# Altium PCB 智能车主板.PcbDoc
Units mil, origin at the board's own origin, x right, y up, seen from the top; angles counter-clockwise.
Board outline 4330 x 2555 mil, 4 copper layers (Top, GND02, PWR03, Bottom), stack 23.756 mil thick; 92 components, 70 nets, 345 pads, 101 vias.
Unrouted connection lines stored in the file: 2.
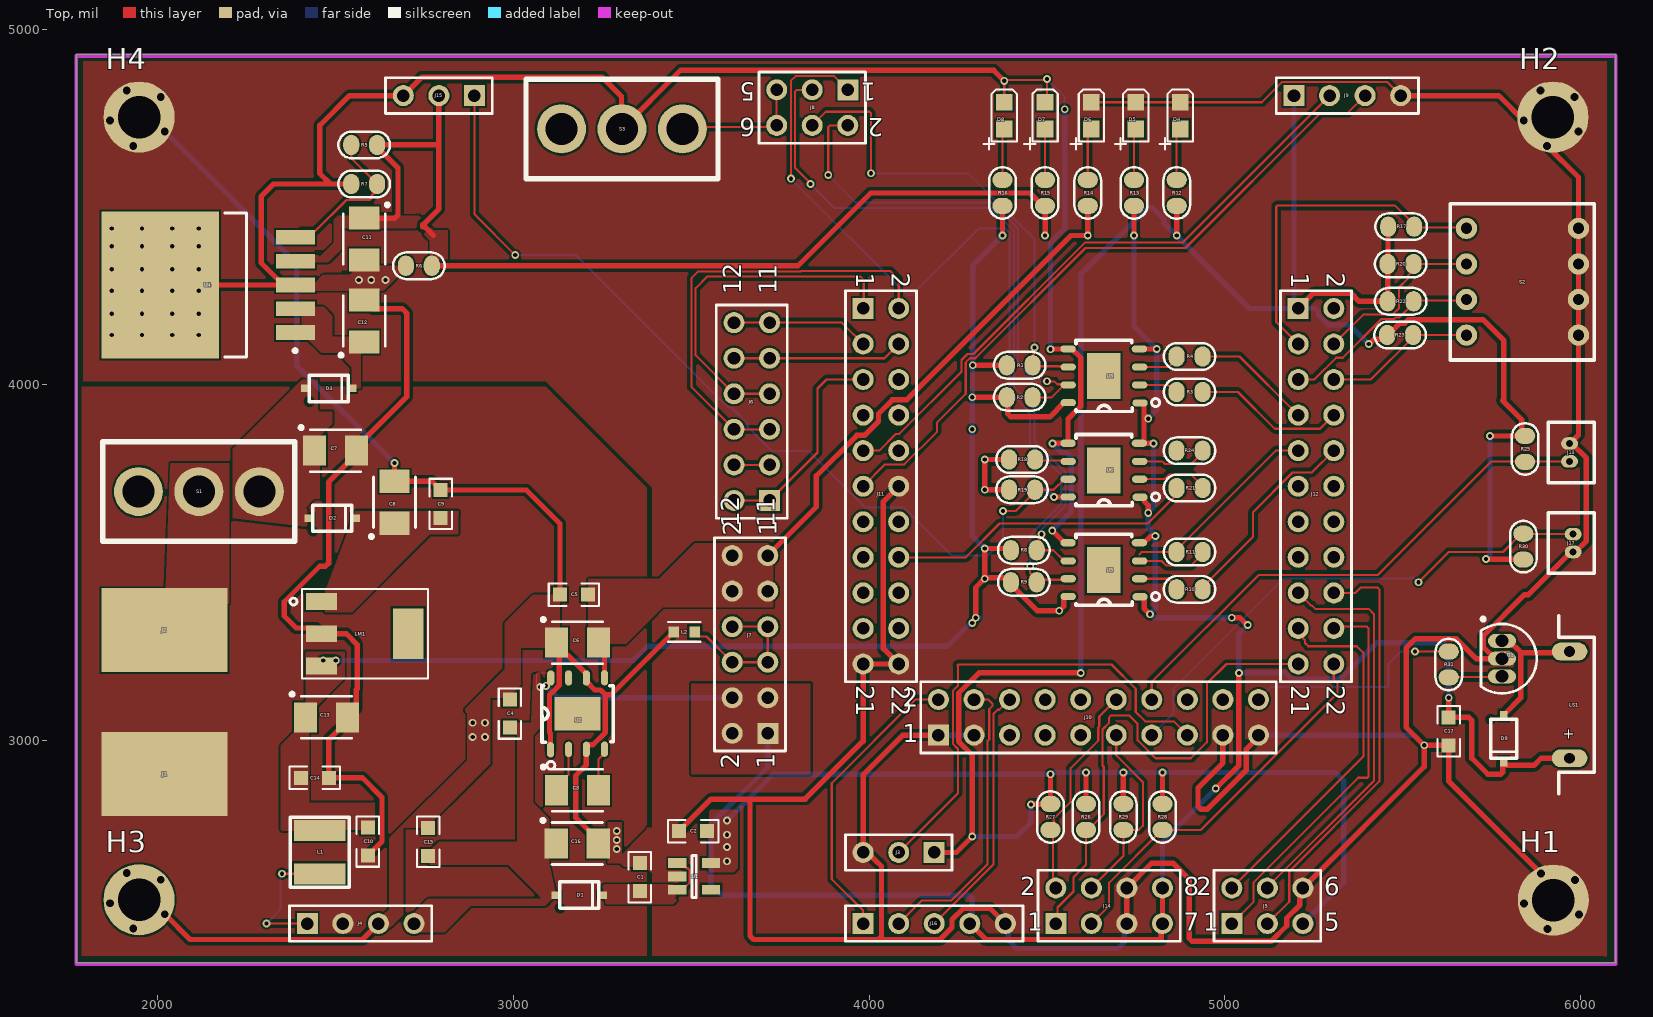
[diagram p0: Top view]
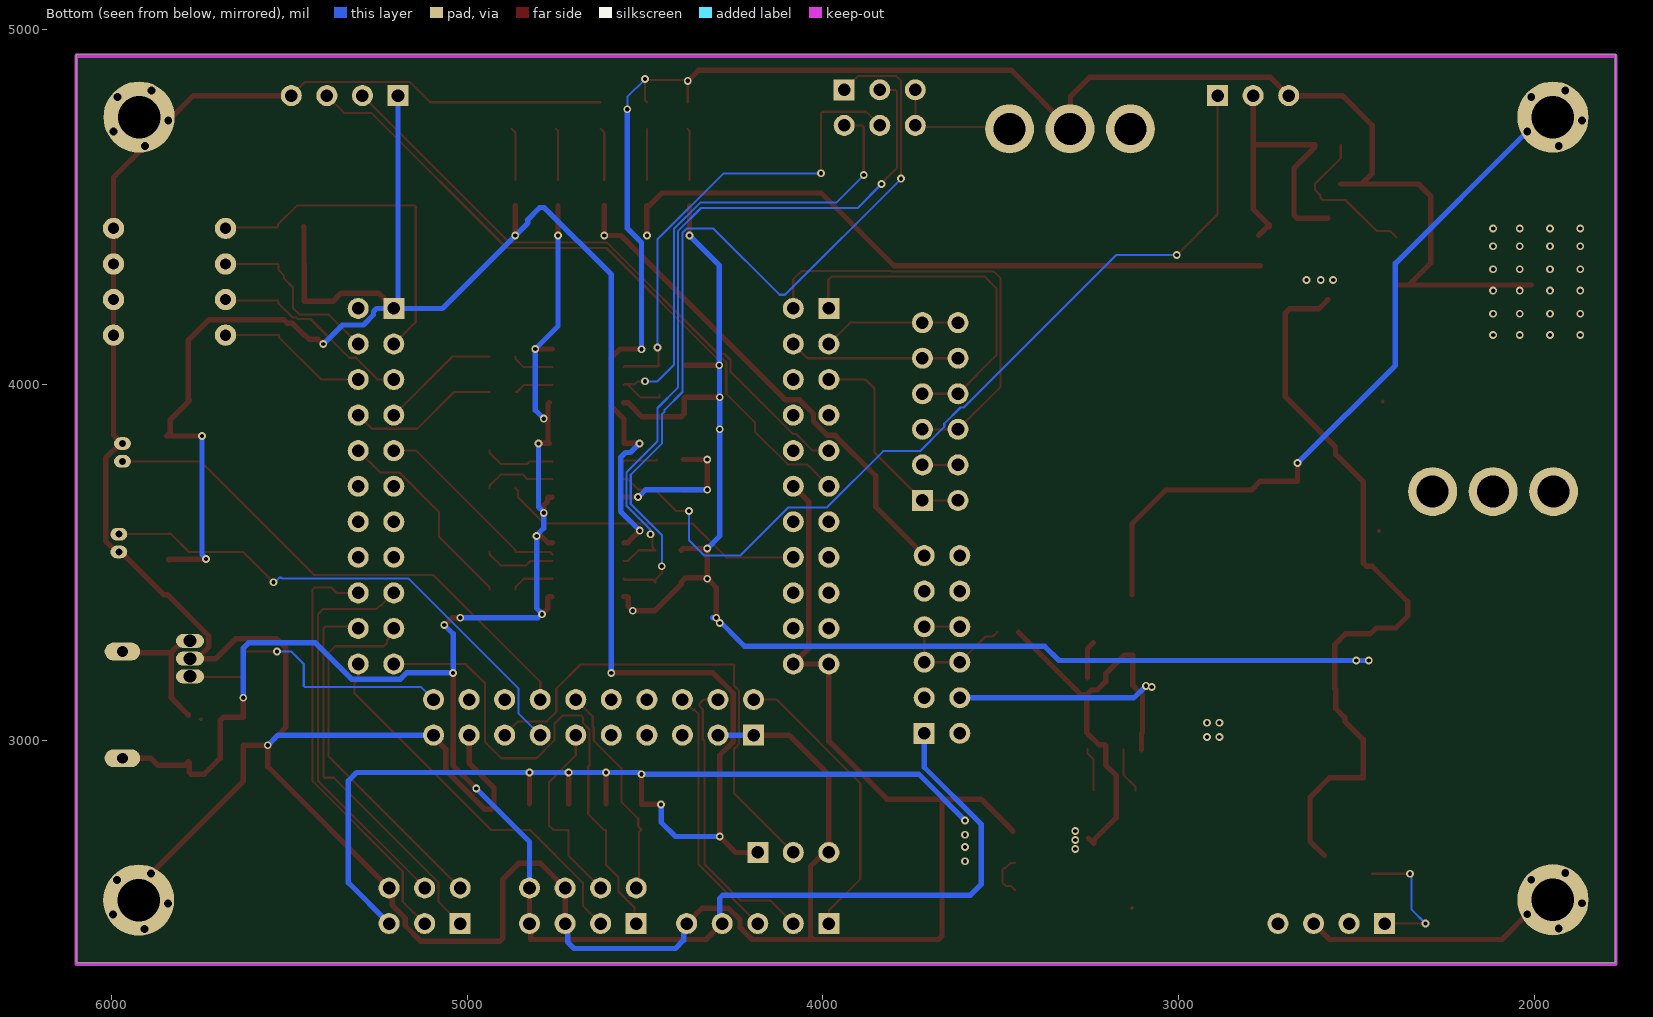
[diagram p1: Bottom view, seen from below]
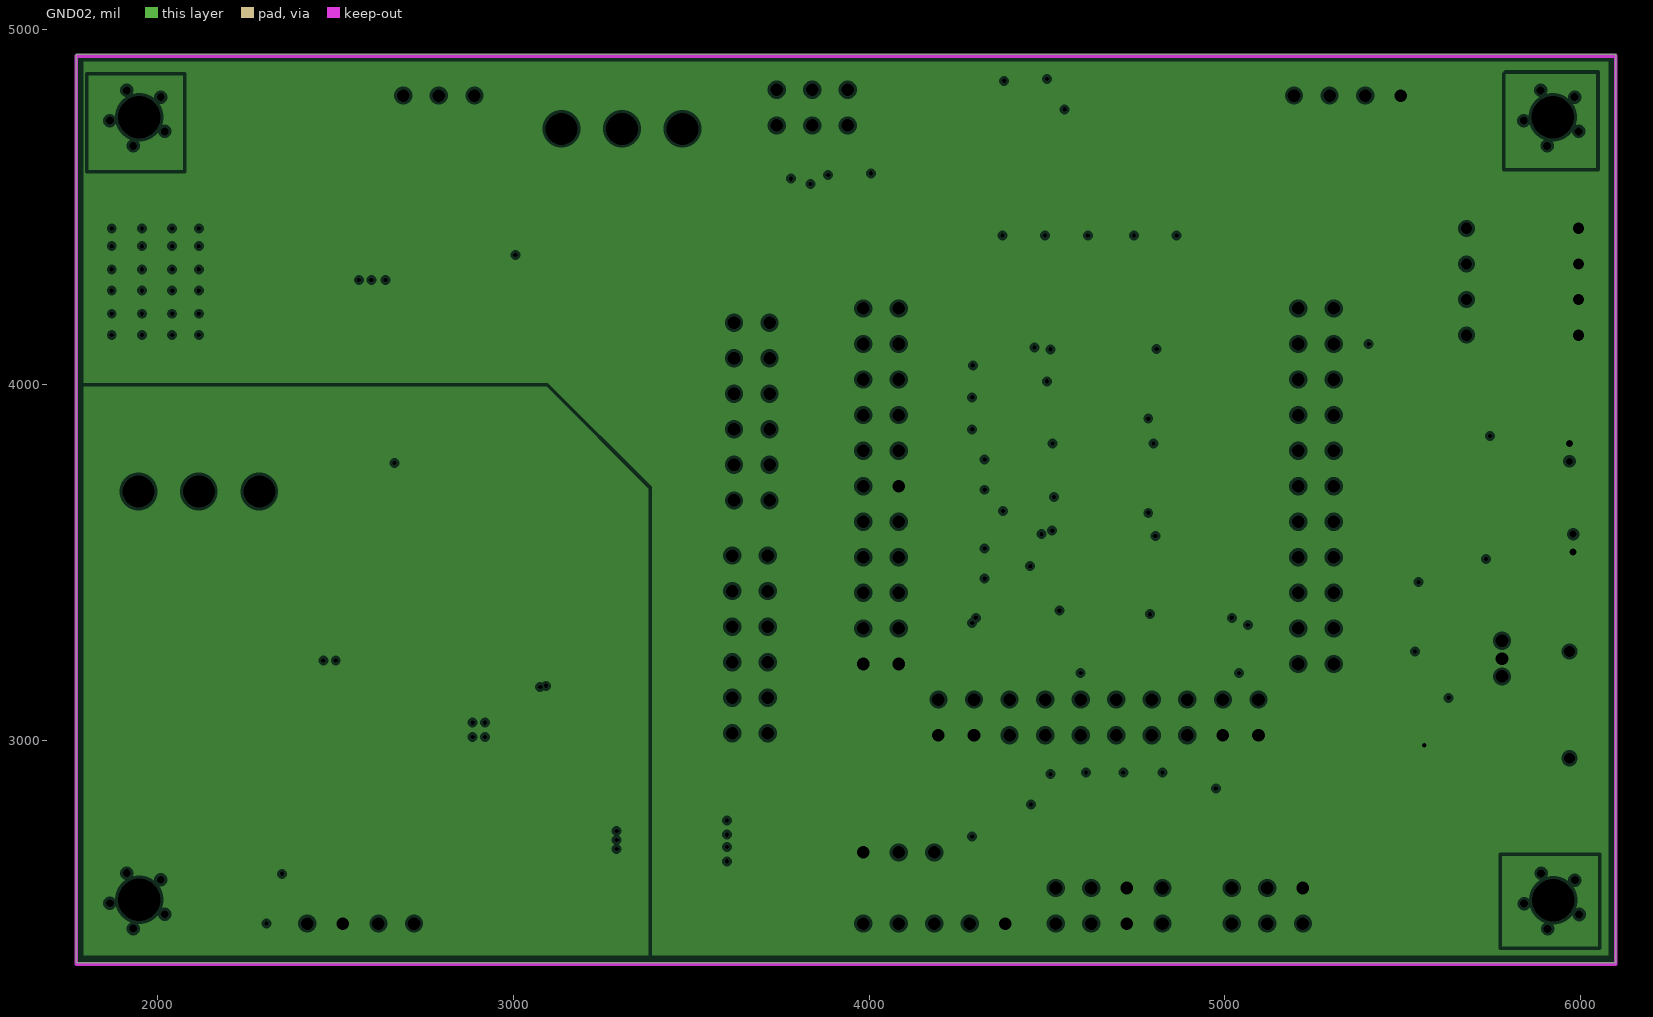
[diagram p2: GND02, clearances drawn from the general rule]
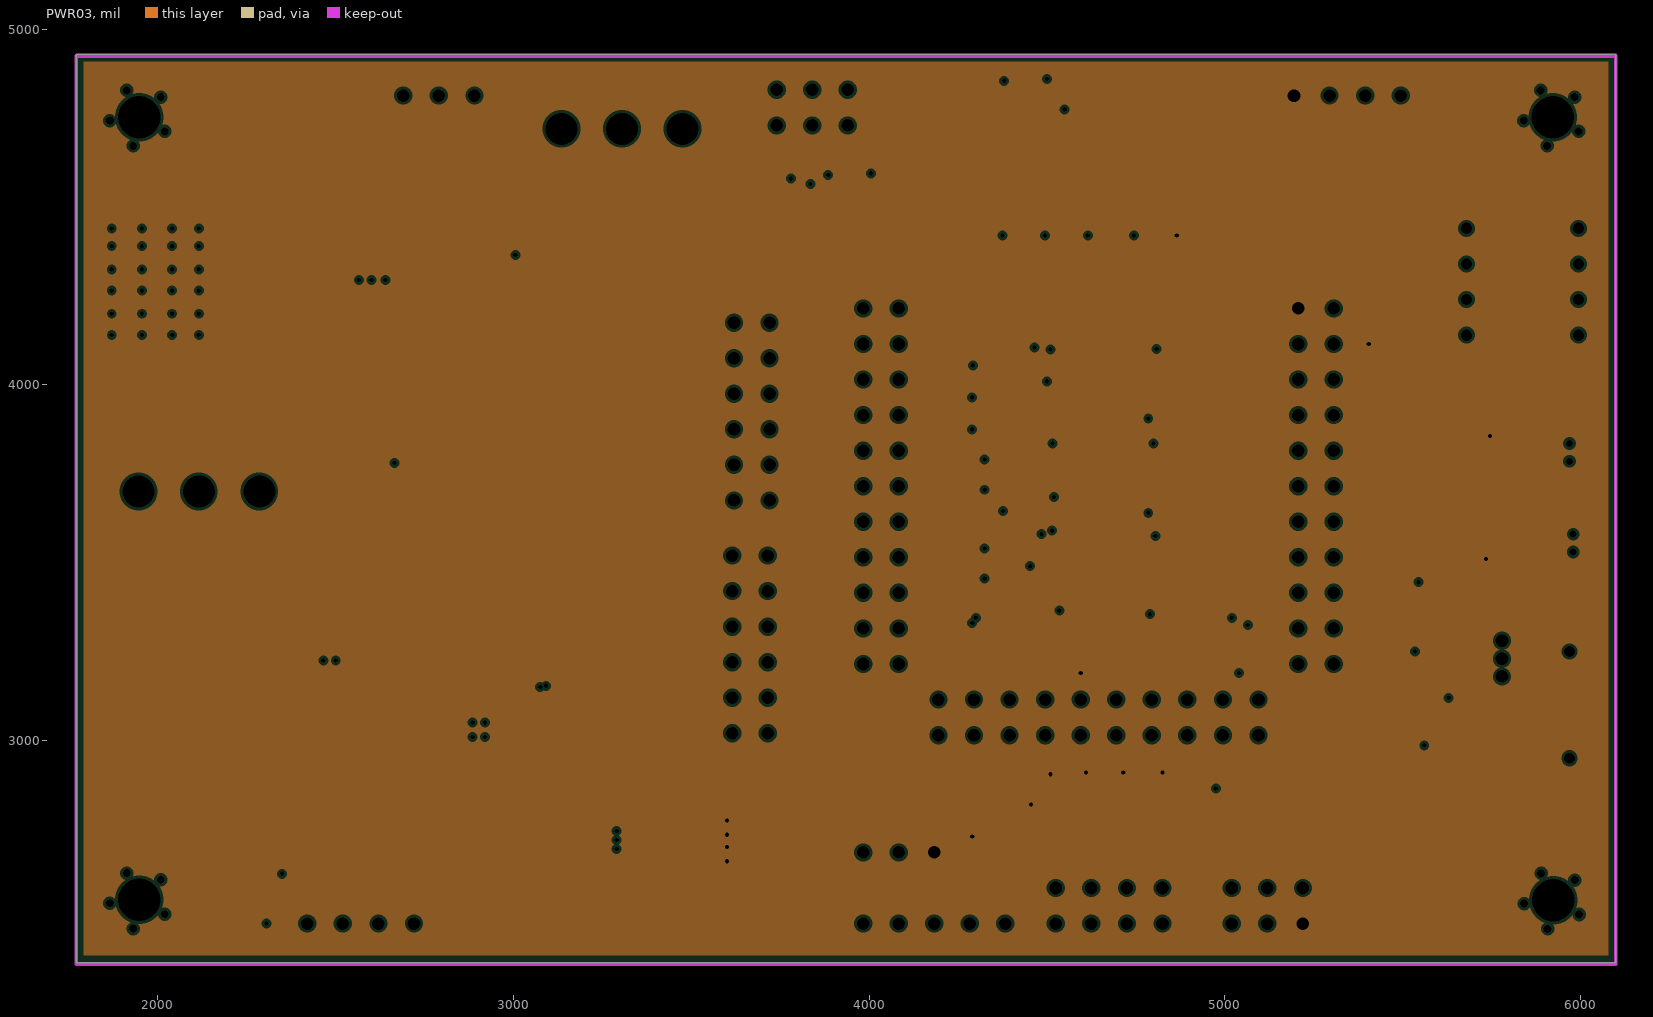
[diagram p3: PWR03, clearances drawn from the general rule]

## Layer stack, top to bottom
Top Solder: solder mask 0.4, Solder Resist, Dk 3.5
Top: signal copper 1.4
Dielectric 2: prepreg 2.8, PP-006, Dk 4.1
GND02: plane copper 1.378, net (Multiple Nets)
Dielectric 1: dielectric 12.6, FR-4, Dk 4.8
PWR03: plane copper 1.378, net VCC3.3
Dielectric 3: prepreg 2.8, PP-006, Dk 4.1
Bottom: signal copper 1.4
Bottom Solder: solder mask 0.4, Solder Resist, Dk 3.5

## Board outline
1770,2375 1770,4930 6099.92,4930 6100,4929.92 6100,2375

## Design rules (kind name [scope] priority, off if disabled: settings)
Clearance [All] p1: gap=6 ignorepadtopadclearanceinfootprint=FALSE except(10: Arc-Fill Arc-Poly Arc-Region Track-Fill Track-Poly Track-Region)
PlaneClearance [All] p1: clearance=8
PlaneConnect [All] p1: planeconnectstyle=Relief reliefexpansion=20 reliefentries=4 reliefconductorwidth=10 reliefairgap=10
PolygonConnect [All] p1: connectstyle=Direct reliefconductorwidth=10 reliefentries=4 polygonreliefangle="90 Angle" airgapwidth=10
RoutingVias [All] p1: holewidth=12 width=22 viastyle="Through Hole" minholewidth=12 minwidth=22 maxholewidth=12 maxwidth=22
SilkToSolderMaskClearance [IsPad] p1: minsilkscreentomaskgap=2 clearancetoexposedcopper=TRUE
SolderMaskExpansion [All] p1: expansion=4 istentingtop=FALSE
SupplyNets "Schematic Supply Nets_10" [InNet('VCC')] p1: voltage=0.000
SupplyNets "Schematic Supply Nets_9" [InNet('V5')] p2: voltage=0.000
SupplyNets "Schematic Supply Nets_8" [InNet('AGND')] p3: voltage=0.000
SupplyNets "Schematic Supply Nets_7" [InNet('GGND')] p4: voltage=0.000
SupplyNets "Schematic Supply Nets_6" [InNet('V6')] p5: voltage=0.000
SupplyNets "Schematic Supply Nets_5" [InNet('VCC-5')] p6: voltage=0.000
SupplyNets "Schematic Supply Nets_4" [InNet('VCC5')] p7: voltage=0.000
SupplyNets "Schematic Supply Nets_3" [InNet('VCC3.3')] p8: voltage=0.000
SupplyNets "Schematic Supply Nets_2" [InNet('VBAT')] p9: voltage=0.000
SupplyNets "Schematic Supply Nets_1" [InNet('VBAT+')] p10: voltage=0.000
SupplyNets "Schematic Supply Nets" [InNet('GND')] p11: voltage=0.000
Width PWR [InNetClass('PWR')] p1: maxlimit=30 minlimit=15 preferedwidth=15
Width [All] p2: maxlimit=6 minlimit=6 preferedwidth=6
27 further rules are at their usual default settings.

## Components (designator, comment, footprint, x,y, rotation, side; value= is the part's Value field where it differs from the comment)
C1 "4.7uF" 0805C 3355,2615.63 r270 top
C2 "4.7uF" 0805C 3505,2745 r0 top
C3 "47uF" B型钽电容_3528_21 3180,2860 r0 top
C4 "10uF" 0805C 2990,3075.63 r270 top
C5 "0.1uF" 0805C 3170,3410 r0 top
C6 "100uF" B型钽电容_3528_21 3180,3275 r0 top
C7 "47uF" B型钽电容_3528_21 2499.06,3815 r0 top
C8 "22uF" B型钽电容_3528_21 2665,3670 r90 top
C9 "0.1uF" 0805C 2795,3665 r90 top
C10 "4.7uF" 0805C 2590,2715.63 r90 top
C11 "22uF" B型钽电容_3528_21 2580,4410 r270 top
C12 "22uF" B型钽电容_3528_21 2580,4180 r90 top
C13 "22uF" B型钽电容_3528_21 2473.62,3065 r0 top
C14 "0.1uF" 0805C 2441.14,2895 r180 top
C15 "0.1uF" 0805C 2760,2715 r270 top
C16 "22uF" B型钽电容_3528_21 3179.06,2710 r0 top
C17 "CAP104" 0805C 5630,3025.63 r90 top
D1 "1N5819" SOD-123 3185,2565 r0 top
D2 "SS34" SOD-123 2490,3625 r0 top
D3 "SS34" SOD-123 2480,3990 r0 top
D4 "LED" 0805D 4875,4757.4 r90 top
D5 "LED" 0805D 4750,4757.4 r90 top
D6 "LED" 0805D 4625,4757.4 r90 top
D7 "LED" 0805D 4495,4757.4 r90 top
D8 "LED" 0805D 4380,4757.4 r90 top
D9 "SS34" SOD-123 5785,3005 r270 top
H1 "HOLE" 铜柱孔3 5924.4,2550.97 r0 top
H2 "HOLE" 铜柱孔3 5923.15,4753.15 r0 top
H3 "HOLE" 铜柱孔3 1946.85,2551.85 r0 top
H4 "HOLE" 铜柱孔3 1946.85,4753.15 r0 top
J1 "-" 单面焊盘2*3MM_1PIN 2018.67,2905 r90 top
J2 "+" 单面焊盘2*3MM_1PIN 2018.67,3310 r90 top
J3 "AD-KEY" HDR1X3 4183.19,2685 r180 top
J4 "CON4" HDR1X4 2420,2485 r0 top
J5 "OLED" HDR2X3 5020,2485 r0 top
J6 "CON12" HDR2X6 3720,3675 r90 top
J7 "CON12" HDR2X6 3715,3020 r90 top
J8 "motor drive" HDR2X3 3940,4829.78 r180 top
J9 "bluebooth" HDR1X4 5195,4813.56 r0 top
J10 "HEADER 10x2" HDR2X10 4195,3015 r0 top
J11 "HEADER 11x2" HDR2X11 3983.19,4215 r270 top
J12 "HEADER 11x2" HDR2X11 5206.81,4215 r270 top
J13 "CON2" 2PIN杜邦插座_1.27MM 5970,3785 r90 top
J14 "RM" HDR2X4 4525,2485 r0 top
J15 "servo drive" HDR1X3 2890,4813.56 r180 top
J16 "CCD" HDR1X5 3983.19,2485 r0 top
J17 "CON2" 2PIN杜邦插座_1.27MM 5980,3580 r270 top
L1 "电感" CDRH3D16_4.2*1.8 2455,2686.02 r180 top
L2 "100M" 0603L 3480,3305 r180 top
LM1 "Im2940" SOT-223 2581.89,3300 r270 top
LS1 "Bell" 蜂鸣器侧装 5970,3150 r90 top
Q1 "2N3904" TO-92A 5780,3230 r180 top
R1 "1k" 0805_RES 4423.58,4055 r180 top
R2 "1k" 0805_RES 4423.58,3965 r180 top
R3 "1k" 0805_RES 4901.42,3980 r180 top
R4 "1k" 0805_RES 4901.42,4080 r180 top
R5 "3.9k" 0805_RES 2580,4675 r0 top
R6 "1k" 0805_RES 2733.58,4335 r0 top
R7 "1k" 0805_RES 2580,4565 r0 top
R8 "1k" 0805_RES 4435,3535 r180 top
R9 "1k" 0805_RES 4435,3445 r180 top
R10 "1k" 0805_RES 4901.42,3425 r180 top
R11 "1k" 0805_RES 4901.42,3530 r0 top
R12 "1k" 0805_RES 4865,4540 r270 top
R13 "2.2k" 0805_RES 4745,4540 r270 top
R14 "3.3k" 0805_RES 4615,4540 r270 top
R15 "3.3k" 0805_RES 4495,4540 r270 top
R16 "3.3k" 0805_RES 4375,4540 r270 top
R17 "1k" 0805_RES 5496.42,4445 r180 top
R18 "1k" 0805_RES 4430,3790 r180 top
R19 "1k" 0805_RES 4430,3705 r180 top
R20 "1k" 0805_RES 5495,4340 r180 top
R21 "1k" 0805_RES 4901.42,3710 r0 top
R22 "1k" 0805_RES 5495,4235 r180 top
R23 "1k" 0805_RES 5493.58,4140 r180 top
R24 "1k" 0805_RES 4901.42,3815 r0 top
R25 "1k" 0805_RES 5845,3820 r90 top
R26 "1k" 0805_RES 4610,2785 r90 top
R27 "1k" 0805_RES 4510,2785 r90 top
R28 "1k" 0805_RES 4825,2785 r90 top
R29 "1k" 0805_RES 4715,2785 r90 top
R30 "1k" 0805_RES 5840,3545 r270 top
R31 "1k" 0805_RES 5630,3213.58 r270 top
S1 "SW-SPST" 开关 2270,3445 r270 top
S2 "SW DIP-4" 4路拨码开关 5695.04,4385 r0 top
S3 "SW-SPST" 开关 3460,4465 r270 top
U1 "TPS73633" SOT23_5-LEADS 3507.76,2617.6 r0 top
U2 "LM2663" SOP-8 3180,3075 r0 top
U3 "HCPL0631" SOP-8 4660.68,4025.22 r90 top
U4 "MIC29302" TO_263_5(10.5*8.4MM) 2164.33,4285 r0 top
U5 "HCPL0631" SOP-8 4660.68,3480 r90 top
U6 "HCPL0631" SOP-8 4660.68,3760 r90 top

## Footprints (in the part's own frame and the unit in brackets; to place one, negate y for a bottom-side part, rotate by r counter-clockwise, add the part's x,y. Pads: shape width x height; smd on the part's side, far side on the other; paste and mask are expansions set on the pad)
2PIN杜邦插座_1.27MM [mm]
  oval 0.9x1.2 hole 0.5: 1(0,0) 2(1.27,0)
  silkscreen extent -1.52,-1.78 2.79,1.52
4路拨码开关 [mil]
  round 60 hole 32.01: 1(-15,55) 2(-15,-45) 3(-15,-145) 4(-15,-245) 5(299.96,-245) 6(299.96,-145) 7(299.96,-45) 8(299.96,55)
  silkscreen extent -60,-315 345,125
0603L [mm]
  rect 0.76x0.8 smd: 1(-0.76,0) 2(0.76,0)
  silkscreen extent -1.15,-0.7 1.15,0.7
0805_RES [mm]
  oval 1.15x1.45 smd: 1(-0.925,0) 2(0.925,0)
  silkscreen extent -1.84,-0.95 1.84,0.95, body extent -1,-0.64 1,0.64, height 0.6
0805C [mm]
  rect 1x1 smd: 1(-1,0) 2(1,0)
  silkscreen extent -1.8,-0.8 1.8,0.8
0805D [mm]
  rect 1.2x1.2 smd: 1(-0.95,0) 2(0.95,0)
  silkscreen extent -2.42,-0.9 1.85,1.49
B型钽电容_3528_21 [mm] "Molded Capacitor, 2-Leads, Body 3.5x2.8mm, IPC Medium Density"
  rect 1.65x2.15 smd: 1(-1.5,0) 2(1.5,0)
  silkscreen extent -2.57,-1.5 1.8,1.77, body extent -1.8,-1.45 1.8,1.45, height 1.9
CDRH3D16_4.2*1.8 [mm]
  rect 3.7x1.5 smd: 1(0,-1.55) 2(0,1.55)
  silkscreen extent -2.1,-2.5 2.1,2.5
HDR1X3 [mm] "Connector; Header; 3 Position"
  rect 1.5x1.5 hole 0.9: 1(0,0)
  round 1.5 hole 0.9: 2(2.54,0) 3(5.08,0)
  silkscreen extent -1.27,-1.27 6.35,1.27
HDR1X4 [mm] "Connector; Header; 4 Position"
  rect 1.5x1.5 hole 0.9: 1(0,0)
  round 1.5 hole 0.9: 2(2.54,0) 3(5.08,0) 4(7.62,0)
  silkscreen extent -1.27,-1.27 8.89,1.27
HDR1X5 [mm] "Connector; Header; 5 Position"
  rect 1.5x1.5 hole 0.9: 1(0,0)
  round 1.5 hole 0.9: 2(2.54,0) 3(5.08,0) 4(7.62,0) 5(10.16,0)
  silkscreen extent -1.27,-1.27 11.43,1.27
HDR2X3 [mm] "Connector; Header; 3x2 Position"
  rect 1.5x1.5 hole 0.9: 1(0,0)
  round 1.5 hole 0.9: 2(0,2.54) 3(2.54,0) 4(2.54,2.54) 5(5.08,0) 6(5.08,2.54)
  silkscreen extent -1.27,-1.27 6.35,3.81
HDR2X4 [mm] "Connector; Header; 4x2 Position"
  rect 1.5x1.5 hole 0.9: 1(0,0)
  round 1.5 hole 0.9: 2(0,2.54) 3(2.54,0) 4(2.54,2.54) 5(5.08,0) 6(5.08,2.54) 7(7.62,0) 8(7.62,2.54)
  silkscreen extent -1.27,-1.27 8.89,3.81
HDR2X6 [mm] "Connector; Header; 6x2 Position"
  rect 1.5x1.5 hole 0.9: 1(0,0)
  round 1.5 hole 0.9: 2(0,2.54) 3(2.54,0) 4(2.54,2.54) 5(5.08,0) 6(5.08,2.54) 7(7.62,0) 8(7.62,2.54) 9(10.16,0) 10(10.16,2.54) 11(12.7,0) 12(12.7,2.54)
  silkscreen extent -1.27,-1.27 13.97,3.81
HDR2X10 [mm] "Connector; Header; 10x2 Position"
  rect 1.5x1.5 hole 0.9: 1(0,0)
  round 1.5 hole 0.9: 2(0,2.54) 3(2.54,0) 4(2.54,2.54) 5(5.08,0) 6(5.08,2.54) 7(7.62,0) 8(7.62,2.54) 9(10.16,0) 10(10.16,2.54) 11(12.7,0) 12(12.7,2.54) 13(15.24,0) 14(15.24,2.54) 15(17.78,0) 16(17.78,2.54) 17(20.32,0) 18(20.32,2.54) 19(22.86,0) 20(22.86,2.54)
  silkscreen extent -1.27,-1.27 24.13,3.81
HDR2X11 [mm] "Connector; Header; 11x2 Position"
  rect 1.5x1.5 hole 0.9: 1(0,0)
  round 1.5 hole 0.9: 2(0,2.54) 3(2.54,0) 4(2.54,2.54) 5(5.08,0) 6(5.08,2.54) 7(7.62,0) 8(7.62,2.54) 9(10.16,0) 10(10.16,2.54) 11(12.7,0) 12(12.7,2.54) 13(15.24,0) 14(15.24,2.54) 15(17.78,0) 16(17.78,2.54) 17(20.32,0) 18(20.32,2.54) 19(22.86,0) 20(22.86,2.54) 21(25.4,0) 22(25.4,2.54)
  silkscreen extent -1.27,-1.27 26.67,3.81
SOD-123 [mm]
  rect 0.65x0.53 smd: 1(-1.65,0) 2(1.65,0)
  Top lines w0.254: -1.397,-0.914 -1.372,-0.94
  silkscreen extent -1.4,-0.94 1.4,0.94
SOP-8 [mm]
  rrect100% 0.51x1.1 smd: 1(-1.928,-2.571) 2(-0.641,-2.543) 3(0.629,-2.543) 4(1.928,-2.528) 5(1.928,2.572) 6(0.629,2.557) 7(-0.641,2.557) 8(-1.911,2.557)
  rect 3.3x2.4 smd: 9(-0.011,0.014)
  silkscreen extent -2.55,-3.97 2.55,2, body extent -2.68,-2.53 2.66,2.55, height 0.25
SOT23_5-LEADS [mm] "SOT23, 5-Leads, Body 3.0x3.0mm (max), Pitch 0.95mm, IPC Low Density"
  rect 1.3x0.7 smd: 1(-1.2,0.95) 2(-1.2,0) 3(-1.2,-0.95) 4(1.2,-0.95) 5(1.2,0.95)
  silkscreen extent -0.15,-1.5 0.15,1.5, body extent -0.85,-1.52 0.85,1.53, height 1.45
SOT-223 [mm]
  rect 1.2x2.2 smd: 1(-2.3,-3.1) 2(0,-3.1) 3(2.3,-3.1)
  rect 3.6x2.2 smd: 4(0,3.1)
  silkscreen extent -3.2,-5.35 3.2,4.5
TO-92A [mm] "TO, Flat Index; 3 In-Line, Axial Leads; Body Dia. 4.5mm; Leads 0.51 x 0.48 mm (max)"
  oval 2x1 hole 0.9: 1(0,-1.27) 2(0,0) 3(0,1.27)
  silkscreen extent -2.48,-2.95 1.5,2.48, body extent -2.48,-2.5 1.5,2.5, height 6.86
TO_263_5(10.5*8.4MM) [mm] "D2-PAK, 6-Pads, Body 8.8x10.3mm (max), IPC Medium Density"
  rect 2.8x1.05 smd: 1(5.65,-3.5) 2(5.65,-1.8) 3(5.65,-0.1) 4(5.65,1.6) 5(5.65,3.3)
  rect 8.4x10.5 smd: 3(-4,-0.1)
  silkscreen extent 0.6,-5.25 5.75,5.05, body extent -8.63,-5.1 7.03,4.9
单面焊盘2*3MM_1PIN [mm]
  rect 6x9 smd: 1(0,0)
开关 [mil]
  round 137.8 hole 90: 1(-255,15) 2(-255,-155) 3(-255,-325)
  silkscreen extent -395,-425 -115,115
蜂鸣器侧装 [mil]
  oval 50x100 hole 30: 1(-200,0) 2(100,0)
  silkscreen extent -300,-70 200,30
铜柱孔3 [mil]
  round 23 hole 22: 11(-82.21,-9.67) 11(-34.6,75.2) 11(-16.21,-81.17) 11(60.83,56.14) 11(72.19,-40.5)
  round 200 hole 120: 11(0,0)

## Part data
C1 C2 C4 C5 C9 C10 C14 C15 C17: library part CAP, "电容"
C3 C6 C7 C8 C11 C12 C13 C16: library part 极性电容
D1: library part SS34, "二极管"
D2 D3 D9: "二极管"
H1 H2 H3 H4: library part 固定孔
J1 J2: library part CON1
J3 J15: library part CON3
J5 J8: library part CON6
J9: library part CON4
J10 J11 J12: "排针"
J14: library part CON8
J16: library part CON5
L1: library part INDUCTOR
L2: library part INDUCTOR_2
LM1 U1 U2 U4: "IC"
Q1: "NPN General Purpose Amplifier"
R1 R2 R3 R4 R5 R6 R7 R8 R9 R10 R11 R12 R13 R14 R15 R16 R17 R18 R19 R20 R21 R22 R23 R24 R25 R26 R27 R28 R29 R30 R31: library part RES, "电阻"
U3 U5 U6: "光耦"

## Via types
v1: diameter 22, hole 12, Top to Bottom, tented both sides, 101 vias

## Nets (pads, with @x,y where several pads share a name; then routed paths per layer and width w, separated by ;. In a path a pad name is that pad's centre, name@x,y a point inside that pad or via, vN(x,y) a via of type N, cw(c..) or ccw(c..) an arc to the next point about the centre after c; other vN are vias at no path point)
ADB2: J6.3 J6.4 | length 100
  Top w6: J6.4 J6.3
ADE20: J6.11 J6.12 J11.3 | length 388
  Top w6: J6.12 J6.11 3923.19,4175 J11.3
ADE21: J6.9 J6.10 J11.4 | length 479.8
  Top w6: J6.10 J6.9 4043.19,4075 J11.4
ADE22: J6.7 J6.8 J11.1 | length 1013.3
  Top w6: J6.7 J6.8 3512,4083 3512,4272 3545,4305 3975,4305 3985,4295 3985,4216.81 J11.1
ADE23: J6.5 J6.6 J11.2 | length 1257.6
  Top w6: J6.5 J6.6 3500,3995 3500,4300 3518.5,4318.5 3806.83,4318.5 3808.33,4320 4060,4320 4083.19,4296.81 J11.2
ADE30: J6.1 J6.2 J11.5 | length 609.5
  Top w6: J6.2 J6.1 3855,3810 3855,3990 3880,4015 J11.5
AGND: J7.5 J7.6 J7.7 J7.8 L2.1 | length 440.7
  Top w6: L2.1 3509.92,3304.21 3521.88,3292.25 3542.75,3292.25 J7.6 J7.5 J7.7 J7.8
B16: J10.11 J14.4 R29.1 | length 546.7
  Top w6: J14.4 4715,2675 R29.1 4758.58,2748.58 4770,2760 4770,2883.28 4695,2958.28 J10.11
B17: J10.12 J14.2 R27.1 | length 612.8
  Top w6: J14.2 4517.5,2592.5 4517.5,2741.08 R27.1 4519.45,2758.03 4519.45,2780.22 4566.71,2827.48 4566.71,2921.71 4644.47,2999.47 4644.47,3035.93 4647.42,3038.88 4647.42,3067.42 J10.12
C0: J3.2 J10.15 | length 1375.9
  Top w6: J3.2 4250,2851.81 4250,2975.82 4235.47,2990.34 4235.47,3139.66 4250,3154.18 4250,3210 4248.49,3211.51 4250.49,3213.51 4681.49,3213.51 4750,3145 4750,3080 4776.47,3053.53 4856.47,3053.53 J10.15
C3: J10.20 R31.1 | length 626.9
  Top w6: v1(5535,3250) R31.1
  Bottom w6: J10.20 5130,3150 5456.49,3150 5460,3153.51 5460,3215 5495,3250 v1(5535,3250)
C4: J12.22 J14.3 R28.1 | length 1085.7
  Top w6: J14.3 4675,2535 4675,2600 4823.58,2748.58 R28.1 4933.58,2748.58 5317.51,3132.51 5317.51,3161.23 5306.81,3171.93 J12.22
C5: J12.21 J14.1 R26.1 | length 1465.5
  Top w6: J14.1 4530,2490 4530,2530 4575,2575 4575,2615 4610,2650 R26.1 4615.91,2748.58 4660,2792.68 4660,2926.22 4656.47,2929.74 4656.47,3030.96 4675,3049.49 4675,3065 4680,3070 4731.49,3070 4755.26,3046.22 4755.26,3000.25 4805.51,2950 4905,2950 4950,2995 4950,3160 5005,3215 J12.21
C6: J5.1 J12.20 | length 1107
  Top w6: J5.1 5081.47,2546.47 5081.47,2600.96 5375.51,2895 5401.49,2895 5405,2898.51 5405,3315 5400,3320 5311.81,3320 J12.20
C7: J5.2 J12.19 | length 1039.1
  Top w6: J5.2 5390,2955 5390,3246.49 5371.49,3265 5235,3265 5225.98,3274.02 5225.98,3281.47 5206.81,3300.64 J12.19
C8: J5.3 J12.18 | length 1207
  Top w6: J5.3 5181.47,2546.47 5181.47,2631.47 5435,2885 5435,3425 5430,3430 5383.08,3430 5368.08,3415 J12.18
C9: J5.4 J12.17 | length 1132.3
  Top w6: J5.4 5120,2586.97 5420,2886.97 5420,3355 5405,3370 5255,3370 5245,3380 5241.81,3380 J12.17
CCDB0: J10.2 J16.1 | length 828.9
  Top w6: J16.1 3983.19,2521.81 3895,2610 3895,2880 4130,3115 J10.2
CCDB1: J10.4 J16.2 | length 833.3
  Top w6: J16.2 4148.19,2550 4231.22,2550 4333.11,2651.89 4333.11,2998.62 4338,3003.51 4338,3088 4347.51,3097.51 4347.51,3102.49 4335,3115 J10.4
CCDB3: J10.6 J16.3 | length 720.7
  Top w6: J16.3 4350,2651.81 4350,3075 4361.34,3086.34 4366.34,3086.34 J10.6
CHGL: J10.13 J17.1 R30.1 | length 1471.6
  Top w6: v1(5545,3445) 5630,3530 5782.68,3530 5834.09,3581.42 R30.1 5840.71,3580.71 5979.29,3580.71 J17.1
  Bottom w6: J10.13 4856.47,3076.47 4856.47,3146.47 5165,3455 5520,3455 5522.51,3457.51 5529.23,3457.51 5541.75,3445 v1(5545,3445)
CHGR: J10.14 J13.1 R25.1 | length 1481.8
  Top w6: J10.14 4795.01,3165.01 5095,3465 5430,3465 5749.29,3784.29 5969.29,3784.29 J13.1
D4: J12.6 R23.1 S2.4 | length 428.5
  Top w6: J12.6 5410.91,4015 5530,4134.09 R23.1 S2.4
D5: J12.5 R22.1 S2.3 | length 569.4
  Top w6: J12.5 5252.32,4015 5313.8,4076.47 5332.06,4076.47 5441.04,4185.46 5476.66,4185.46 5481.2,4190 5491.49,4190 5531.42,4229.93 R22.1 5533.92,4237.5 5677.54,4237.5 S2.3
D6: J12.4 R20.1 S2.2 | length 514.9
  Top w6: J12.4 5389.27,4197.46 5471.69,4197.46 5490.22,4215.99 5490.22,4273.74 5515.19,4298.71 5515.19,4307.24 5531.42,4323.47 R20.1 S2.2
D7: J12.3 R17.1 S2.1 | length 979
  Top w6: J12.3 5145,4176.81 5145,4501.49 5148.51,4505 5478.74,4505 5532.83,4450.91 R17.1 5535.33,4442.5 5677.54,4442.5 S2.1
GGND: C7.2 C10.1 C11.2 C12.2 C13.2 C14.1 D7.2 D8.2 J1.1 J4.2 J15.3 LM1.2 R6.1 R7.1 S3.2 U3.5 U4.3 U5.5 U6.5 | length 7208.4
  Top w6: D8.2 v1(4380,4855) 4382.5,4857.5 4497.5,4857.5 v1(4500,4860) 4500,4799.8 D7.2
  Top w15: U4.3@2006.85,4281.06 2339.16,4281.06 2340,4281.91 2340,4285 2343.94,4281.06 U4.3@2352.33,4281.06 ; U4.3@2386.78,4281.06 U4.3@2352.33,4281.06 ; R7.1 2485,4565 ; C12.2 2604.98,4214.07 2687.14,4214.07 2700,4201.21 2700,3966.73 2558.11,3824.84 C7.2 2558.11,3805.16 2480,3727.05 2480,3498.79 2471.21,3490 2455,3490 2355,3390 2355,3350 2388.88,3316.12 2443.72,3316.12 LM1.2 2530,3300 2560,3270 2560,3145 2557.66,3142.66 2557.66,3089.98 C13.2 2532.68,3055.16 2480.51,3002.99 C14.1 2575,2895 2630,2840 2630,2716.26 C10.1 ; v1(4380,4855) 4350.19,4884.81 3469.81,4884.81 S3.2 3303.6,4721.4 3303.6,4811.4 3250,4865 2741.44,4865 J15.3 2538.56,4813.56 2455,4730 2455,4595 2485,4565 ; v1(4510,4100) 4511.12,4101.12 U3.5 4571.05,4101.12 4595.15,4077.01 4595.15,3940.25 4559.44,3904.53 U6.5 4515.9,3835.9 v1@4515,3835 ; v1(4515,3590) 4549.1,3555.9 U5.5 ; U4.3@2352.33,4281.06 2290,4343.39 2290,4530 2325,4565 2485,4565
  Bottom w6: v1(4500,4860) 4550,4810 v1(4550,4775)
  Bottom w15: v1(4510,4100) 4510,4400.35 4550,4440.35 v1@4550,4766.21 ; v1(4515,3590) 4568.72,3643.72 4568.72,3796.28 4555,3810 4540.9,3810 v1(4515.45,3835.45)
  other v1: 1870,4140 1955,4140 2040,4140 2115,4140 1870,4200 1955,4200 2040,4200 2115,4200 1870,4265 1955,4265 2040,4265 2115,4265 2565,4295 2600,4295 2640,4295 1870,4325 1955,4325 2040,4325 2115,4325 1870,4390 1955,4390 2040,4390 2115,4390 1870,4440 1955,4440 2040,4440 2115,4440
GND: C1.1 C2.1 C4.1 C5.1 C6.1 C8.2 C9.2 C15.1 C16.2 C17.1 D4.2 D5.2 D6.2 H1.11 H2.11 H3.11 H4.11 J3.3 J4.3 J5.6 J9.4 J10.1 J10.3 J10.17 J10.19 J11.12 J11.21 J11.22 J13.2 J14.5 J14.6 J16.5 J17.2 L2.2 Q1.2 S2.5 S2.6 S2.7 S2.8 U1.2 U2.1 U2.3 U2.6 | length 14473
  Top w6: D6.2 D5.2 D4.2 5104.46,4794.8 5161.74,4852.09 5456.47,4852.09 J9.4 ; H2.11@5833.53,4766.76 5840.94,4759.35 5840.94,4743.48 5850.61,4753.15 5923.15,4753.15 H2.11@5923.15,4742.7
  Top w15: H3.11@2019.04,2511.35 2090.39,2440 2575,2440 J4.3 ; v1(2665,3780) C8.2 2770.32,3729.06 C9.2 3035.63,3704.37 3130.63,3609.37 C5.1 ; U2.1 3104.1,3019.73 3101.1,3022.73 3101.1,3128.4 3109.01,3136.31 3110.32,3136.31 3128.32,3154.31 3128.32,3240.18 3151.9,3240.18 3204.78,3187.29 U2.6 3204.78,3165.44 3228.34,3141.88 3244.55,3141.88 3258.02,3128.4 ; C16.2@3253.11,2725 C16.2 3238.11,2719.84 3175,2782.95 3175,2900.95 3204.78,2930.74 U2.3 3204.78,2985.13 3207.13,2987.48 3222.77,2987.48 3258.02,3022.73 3258.02,3128.4 ; L2.2 3450.08,3304.21 3274.27,3128.4 3258.02,3128.4 ; C2.1 3555.63,2835 3656.21,2835 ; J11.12 4040.16,3671.97 4040.16,3258.03 J11.22 J11.21 3983.19,2998.19 3820,2835 3656.21,2835 ; J10.1 4095,3015 3983.19,2903.19 J3.3 3995.11,2685 4023.29,2656.82 4024.39,2656.82 4035,2646.21 4035,2448.79 4026.21,2440 ; J16.5 4340.16,2528.03 4265.37,2528.03 4233.19,2495.85 4233.19,2474.15 4199.04,2440 4026.21,2440 ; J14.5 J14.6 4795,2655 4855,2655 4900,2610 4900,2443.79 4908.79,2435 5130.85,2435 5174.7,2478.85 5174.7,2500.55 5211.57,2537.42 5211.57,2576.57 J5.6 5561.26,2926.26 v1(5561.26,2986.26) ; J10.17 4995,2936.54 4925,2866.54 4925,2815 4933.79,2806.21 4950.86,2806.21 5061,2916.35 5061,2975.42 5095,3009.42 J10.19 ; J9.4 5770.86,4813.56 H2.11@5840.94,4743.48 ; Q1.2 Q1.2@5760.31,3230 ; H1.11@5889.8,2626.18 5630,2885.97 C17.1 v1(5561.26,2986.26) ; H2.11@5906.94,4671.97 5995,4583.91 S2.8 S2.7 S2.6 S2.5 5995,3859.62 J13.2@5970.38,3835 ; J13.2 J13.2@5970.38,3835 ; 3656.21,2835 3665,2826.21 3665,2450 3675,2440 4026.21,2440 ; v1(5561.26,2986.26) 5510.5,3037.02 5510.5,3260.15 5536.49,3286.14 5651.02,3286.14 5707.16,3230 Q1.2@5760.31,3230 ; Q1.2@5760.31,3230 5727.13,3263.19 5727.13,3293.75 5843.3,3409.92 5854.01,3409.92 5974.09,3530 J17.2 5985.91,3530 6017.12,3561.22 6017.12,3793.78 5975.91,3835 J13.2@5970.38,3835
  Bottom w15: H4.11@2019.04,4712.65 2390,4341.69 2390,4055 v1(2665,3780) ; J10.1 J10.3 ; J16.5 4391.62,2476.57 4391.62,2438.38 4415,2415 4700,2415 4717.97,2432.97 4717.97,2477.97 J14.5 ; J10.19 5532.52,3015 v1(5561.26,2986.26)
  other v1: 3290,2695 3290,2720 3290,2745 2885,3010 2920,3010 2885,3050 2920,3050
LPWM1: J8.1 R9.1 U5.7 | length 2468.7
  Top w6: v1(3780,4580) 3780,4855 3793.31,4868.31 3901.47,4868.31 J8.1 ; v1(4453,3490) 4453,3470.15 4471.42,3451.73 R9.1 4478.51,3452.09 4557.31,3452.09 U5.7
  Bottom w6: v1(3780,4580) 4106.53,4253.47 4121.53,4253.47 4308.06,4440 4383.28,4440 4395,4428.28 4395,3980 4445,3930 4445,3925 4453,3917 4453,3834.66 4540.22,3747.44 4540.22,3665.1 4453,3577.88 v1(4453,3490)
LPWM2: J8.3 R8.1 U5.6 | length 2047.3
  Top w6: v1(3835,4565) 3835,4567 3792,4610 3792,4825 3796.78,4829.78 J8.3 ; v1(4485,3580) 4485,3575.67 4478.93,3569.6 4478.93,3542.51 R8.1 4518.17,3535 4548.39,3504.78 U5.6
  Bottom w6: v1(3835,4565) 3902.4,4497.6 4342.66,4497.6 4407,4433.25 4407,3993 4465,3935 4465,3841.17 4552.22,3753.95 4552.22,3660.13 4485,3592.91 v1(4485,3580)
"motor L+": J12.10 R10.1 | length 574.8
  Top w6: R10.1 4937.83,3430.91 5079.57,3572.64 5079.57,3642.25 5190.85,3753.53 5245.34,3753.53 J12.10
"motor L-": J12.9 R11.1 | length 570.1
  Top w6: 4760.79,3523.82 4766.97,3530 R11.1 4865,3535.91 5144.09,3815 J12.9
"motor R+": J12.8 R3.1 | length 427.8
  Top w6: R3.1 5037.61,3980 5141.14,3876.47 5268.28,3876.47 J12.8
"motor R-": J12.7 R4.1 | length 337.3
  Top w6: R4.1 5041.81,4080 J12.7
NetC1_2: C1.2 D1.2 U1.1 U1.3 | length 120.7
  Top w6: U1.3 3471.29,2590.98 3485.99,2590.98 3495.1,2600.09 3495.1,2635.11 3489.83,2640.38 3486.94,2640.38 3472.32,2655 U1.1
NetC3_1: C3.1 U2.2 | length 128.9
  Top w6: C3.1 3120.94,2869.84 3154.78,2903.68 U2.2
NetC3_2: C3.2 U2.4 | length 122.4
  Top w6: C3.2 3239.06,2947 3255.9,2963.84 U2.4
NetC8_1: C8.1 C9.1 D2.2 LM1.1
NetC12_1: C12.1 D3.2 U4.1 U4.2
NetD4_1: D4.1 R12.1 | length 147.7
  Top w6: R12.1 4865,4710 D4.1
NetD5_1: D5.1 R13.1 | length 145.7
  Top w6: R13.1 4745,4715 D5.1
NetD6_1: D6.1 R14.1 | length 147.7
  Top w6: R14.1 4615,4710 D6.1
NetD7_1: D7.1 R15.1 | length 143.6
  Top w6: R15.1 D7.1
NetD8_1: D8.1 R16.1 | length 145.7
  Top w6: R16.1 4375,4715 D8.1
NetD9_1: D9.1 LS1.2 Q1.1 | length 403.6
  Top w6: LS1.2@5968.69,3251.31 LS1.2
  Top w15: Q1.1 5799.69,3280 5832.87,3246.81 ; D9.1 5785,3072.32 5832.87,3120.19 5832.87,3246.81 ; LS1.2 5966.81,3246.81 5832.87,3246.81
NetJ4_1: J4.1 L1.2 | length 379.5
  Top w6: v1(2305,2485) J4.1 ; v1(2348.51,2625) L1.2
  Bottom w6: v1(2305,2485) 2345,2525 2345,2621.49 v1(2348.51,2625)
NetJ8_5: J8.5 J8.6 S3.1 | length 369.1
  Top w6: S3.1 3479.89,4724.89 3735.11,4724.89 J8.6 J8.5
NetQ1_3: Q1.3 R31.2 | length 151.2
  Top w6: R31.2 5631.42,3178.58 5778.58,3178.58 Q1.3
NetR3_2: R3.2 U3.2 | length 112.5
  Top w6: U3.2 4840.28,4000 4860.28,3980 R3.2
NetR4_2: R4.2 U3.3 | length 120.1
  Top w6: U3.3 4840.91,4050 4865,4074.09 R4.2
NetR5_1: R5.1 R7.2 U4.5 | length 445.8
  Top w6: U4.5 2404.44,4432.59 2442.59,4432.59 2530,4520 2595,4520 2600.42,4525.42 2600.42,4532.47 2616.42,4548.47 R7.2 2543.58,4637.83 R5.1
NetR10_2: R10.2 U5.2 | length 120
  Top w6: U5.2 4841.12,3454.78 4865,3430.91 R10.2
NetR11_2: R11.2 U5.3 | length 201.2
  Top w6: U5.3 4822.34,3504.78 4834.67,3492.46 4906.2,3492.46 4937.83,3524.09 R11.2
NetR18_1: R18.1 U6.6 | length 95.7
  Top w6: R18.1 4469.03,3787.39 4557.39,3787.39 U6.6
NetR21_2: R21.2 U6.2 | length 201.3
  Top w6: U6.2 4830.86,3734.78 4843.62,3747.54 4906.2,3747.54 4937.83,3715.91 R21.2
NetR24_2: R24.2 U6.3 | length 199.1
  Top w6: U6.3 4824.84,3784.78 4832.17,3777.46 4906.2,3777.46 4937.83,3809.09 R24.2
PWM5: J11.16 R21.1 | length 873.3
  Top w6: J11.16 4271.72,3515 4366.72,3610 4783.28,3610 4857.48,3684.2 4857.48,3702.49 R21.1
RPWM1: J8.2 R2.1 U3.7 | length 1444.1
  Top w6: v1(3885,4590) 3885,4725 3889.78,4729.78 J8.2 ; R2.1@4460,3970.91 R2.1 4513.39,3965 U3.7@4548.39,4000 ; v1(4500,4010) 4520.98,4010 4529.35,4001.64 4558.36,4001.64 U3.7
  Bottom w6: v1(3885,4590) 3962.42,4512.58 4344.64,4512.58 4419,4438.23 4419,4056 4465,4010 v1(4500,4010)
RPWM2: J8.4 R1.1 U3.6 | length 1347.5
  Top w6: J8.4 3878.53,4768.31 4001.49,4768.31 4005,4764.8 v1(4005,4595) ; v1(4465,4105) 4462.5,4102.5 4462.5,4057.5 R1.1 4462.5,4052.5 4557.5,4052.5 U3.6
  Bottom w6: v1(4005,4595) 4279.2,4595 4465,4409.2 v1(4465,4105)
RX: J9.3 J11.11 | length 1933.8
  Top w6: J11.11 4044.66,3776.47 4099.15,3776.47 4191.29,3868.61 4191.29,3894.57 4271.72,3975 4271.72,4063.28 4283.43,4075 4298.69,4075 4608.69,4385 4890,4385 5270,4765 5346.44,4765 J9.3
SERVODUTY: J15.1 R19.1 U6.7 | length 2546.8
  Top w6: J15.1 2890,4480 v1(3005,4365) ; v1(4376.64,3645.14) 4412.46,3645.14 4466.42,3699.09 R19.1 4518.6,3705 4548.39,3734.78 U6.7
  Bottom w6: v1(3005,4365) 3175.51,4365 3604.04,3936.47 3613.01,3936.47 3658.53,3890.96 3658.53,3881.99 3726.99,3813.53 3830.18,3813.53 3988.7,3655 4097.68,3655 4232.68,3520 4333.28,3520 4376.64,3563.36 v1(4376.64,3645.14)
TX: J9.2 J11.9 | length 1744.7
  Top w6: J11.9 4028.7,3815 4075.8,3862.1 4084.77,3862.1 4259.72,4037.04 4259.72,4069.97 4276.75,4087 4293.72,4087 4606.72,4400 4881.44,4400 J9.2
V5: C10.2 C13.1 C14.2 L1.1 LM1.3 R1.2 R2.2 R8.2 R9.2 R16.2 U3.8 U5.8 | length 3962.9
  Top w15: v1(2465,3225) v1(2500,3225) ; v1(4290,3965) R2.2 4390,3962.17 4390,3918.79 4398.79,3910 4508.39,3910 4548.39,3950 U3.8 ; v1(4291.72,4055) R1.2 ; v1(4300,3345) 4300,3430 v1(4325,3455) ; v1(4375,4420) R16.2 ; R8.2 4393.58,3540 v1(4325,3540) v1(4325,3455) ; U5.8 4549.76,3404.78 4547.41,3402.44 4547.41,3377.41 v1(4535,3365) 4472.68,3365 4398.58,3439.09 R9.2 4386.88,3456.7 4375.17,3456.7 4374.66,3457.21 4329.1,3457.21 4326.89,3455 v1(4325,3455)
  Bottom w15: v1(2465,3225) v1(2500,3225) 3336.25,3225 3376.25,3265 4220,3265 v1(4300,3345) v1@4310,3345 ; v1(4325,3540) 4290,3575 v1(4290,3875) v1(4290,3965) 4290.86,3965.86 4290.86,4054.14 v1(4291.72,4055) 4291.72,4336.72 v1(4375,4420)
  other v1: 4290,3330
V6: C11.1 J15.2 R5.2 R6.2 R15.2 U4.4 | length 2829.6
  Top w15: C11.1 2666.21,4469.06 2675,4477.84 2675,4610.51 2616.42,4669.09 R5.2 2790,4675 ; R6.2 3800,4335 4004.72,4539.72 4452.96,4539.72 4489.09,4503.58 R15.2 v1(4495,4420) ; 2775,4420 2750,4445 2745,4445 2745,4450 2790,4495 2790,4675 ; J15.2 2790,4675
VBAT: C7.1 D2.1 D3.1 S1.1
VBAT+: J2.1 S1.2
VCC: R18.2 R19.2 U6.8 | length 465.5
  Top w15: R19.2 v1(4325,3705) v1(4325,3790) R18.2 ; v1(4520.22,3684.78) U6.8
  Bottom w15: v1(4325,3705) 4498.11,3705 4518.32,3684.78 v1(4520.22,3684.78)
VCC3.3: C2.2 J3.1 J5.5 J9.1 J12.1 R12.2 R17.2 R20.2 R22.2 R23.2 R25.2 R26.2 R27.2 R28.2 R29.2 R30.2 U1.5 | length 8436.4
  Top w15: J3.1 4245,2685 v1(4290,2730) 4290,2959.15 4251.97,2997.18 4251.97,3132.82 4309.15,3190 v1(4595,3190) ; v1(4455,2820) 4455.71,2820.71 4509.29,2820.71 R27.2 v1(4510,2905) ; R26.2 v1(4610,2910) ; R29.2 v1(4715,2910) ; R28.2 v1(4825,2910) ; v1(4865,4420) R12.2 ; J12.1 5249.84,4258.03 5355.28,4258.03 5378.31,4235 R22.2 R20.2 5459.29,4340.71 5459.29,4444.29 R17.2 ; v1(5405,4115) 5406.89,4115 5420.2,4128.3 5445.47,4128.3 R23.2 5459.45,4140 5492.95,4173.5 5506.49,4173.5 5516.49,4183.5 5726.5,4183.5 5785,4125 5785,3960 5781.21,3956.21 5835.87,3901.56 5835.87,3865.55 R25.2 v1(5746.42,3856.42) ; v1(5735,3510) 5838.58,3510 R30.2
  Bottom w15: v1(3600,2775) 3730,2905 v1(4510,2905) 4511.89,2905 4516.89,2910 v1(4610,2910) v1(4715,2910) v1(4825,2910) 5311.21,2910 5335,2886.21 5335,2600 J5.5 ; v1(4290,2730) 4415,2730 4455,2770 v1(4455,2820) ; v1(4595,3190) 4595,4310 4783.79,4498.79 4796.21,4498.79 4829.94,4465.06 4829.94,4455.06 v1(4865,4420) 5070,4215 J12.1 ; J9.1 5195,4226.81 J12.1 ; v1(5405,4115) 5351.41,4168.59 5292.37,4168.59 5263.78,4197.18 5263.78,4206.21 5255,4215 J12.1 ; v1(5735,3510) 5735,3511.89 5746.42,3523.31 v1(5746.42,3856.42)
  other v1: 3600,2660 3600,2700 3600,2735
VCC5: C4.2 C15.2 C16.1 C17.2 D1.1 D9.2 J4.4 J7.1 J7.2 J7.3 J7.4 J14.7 J14.8 J16.4 LS1.1 R13.2 U2.8 U3.1 U3.4 U5.1 U5.4 U6.1 U6.4 | length 6568.7
  Top w15: J16.4 4328.19,2440 4821.21,2440 4821.21,2481.21 J14.7 J14.8 ; v1(4745,4420) R13.2 ; U5.4 4773.21,3555.9 4792.32,3575 v1(4805,3575) ; U3.4 v1(4808.88,4101.12) ; U5.1 4771.09,3404.1 4773.44,3401.76 4773.44,3371.56 v1(4790,3355) ; U6.1 4772.16,3684.1 4774.5,3681.76 4774.5,3671.52 4785,3661.02 v1(4785,3640) ; U3.1@4769.9,3950.29 4773.22,3946.98 4773.22,3916.78 ; U6.4@4770,3835.9 U6.4@4770.46,3835.9 ; v1(4785,3905) 4773.22,3916.78 ; v1(4800,3835) 4799.1,3835.9 U6.4@4770.46,3835.9 ; v1(4975,2865) 5040,2930 v1(5040,3190) ; v1(5020,3345) 5043.11,3345 5063.11,3325 v1(5065,3325) ; v1(5630,3120) C17.2 5686.21,3065 5695,3056.21 5695,2950 5740,2905 5776.21,2905 5782.07,2910.85 5782.07,2937.11 D9.2 5785,2937.68 5787.93,2934.74 5790.3,2934.74 5795.04,2930 5870,2930 5890,2950 LS1.1 ; U6.4@4770.46,3835.9 4772.81,3838.24 4772.81,3838.71 4773.22,3839.11 4773.22,3916.78
  Bottom w15: v1(3091.53,3153.47) 3125,3120 J7.4 ; J7.1 3715,2924.65 3555,2764.65 3555,2595 3585,2565 4281.21,2565 4290,2556.21 4290,2491.81 J16.4 ; v1(4745,4420) 4745,4165 v1(4808.88,4101.12) 4808.88,3928.88 v1(4785,3905) ; v1(4800,3835) 4800,3656.89 4785,3641.89 v1(4785,3640) 4785,3596.89 4805,3576.89 v1(4805,3575) 4805,3371.89 4790,3356.89 v1(4790,3355) 4791.89,3355 4801.89,3345 v1(5020,3345) ; J14.8 4825,2715 v1(4975,2865) v1@4975,2870 ; v1(5065,3325) 5040,3300 v1(5040,3190) 5170.96,3190 5188.99,3171.97 5324.63,3171.97 5427.16,3274.5 5615.5,3274.5 5630,3260 v1(5630,3120)
  other v1: 3075,3150
VCC-5: C5.2 C6.2 J7.9 J7.10 J7.11 J7.12 R14.2 U2.5 | length 1526.2
  Top w15: C6.2 3255.9,3258.16 U2.5 ; J7.11 3851.37,3656.37 3851.37,3744.03 3965.37,3858.03 3987.07,3858.03 4026.22,3897.18 4026.22,3918.88 4065.37,3958.03 4105.64,3958.03 4567.61,4420 v1(4615,4420) R14.2
pads on no net: J10.5 J10.7 J10.8 J10.9 J10.10 J10.16 J10.18 J11.6 J11.7 J11.8 J11.10 J11.13 J11.14 J11.15 J11.17 J11.18 J11.19 J11.20 J12.2 J12.11 J12.12 J12.13 J12.14 J12.15 J12.16 LM1.4 R24.1 S1.3 S3.3 U1.4 U2.7 U2.9 U3.9 U5.9 U6.9

## Polygon pours and split planes (outlines as drawn)
GGND on Top "GGND_L01_P031" (solid, pour order 31): 1785,3995 3090,3995 3375,3710 3375,2395 1785,2395
GND on Top "GND_L01_P030" (solid, pour order 30): 6075,4910 6075,2385 6065,2395 3390,2395 3390,3710 3090,4010 1790,4010 1790,4910
VBAT on Top "VBAT_L01_P002" (solid, pour order 2): 2210,3625 2210,3820 2405,4015 2450,4015 2450,3930 2455,3925 2490,3925 2490,3890 2455,3855 2455,3680 2440,3680 2415,3655 2420,3650 2420,3600
GND on Top "GND_L01_P008" (solid, pour order 8): 2660,2480 2690,2510 2690,2755 2755,2755 2935,2935 2935,3120 2985,3120 3020,3155 3020,3260 3105,3260 3130.63,3285.63 3130.63,3410 3055,3410 2975,3330 2975,3200 2860,3085 2870,3075 2870,2945 2650,2725 2650,2525 2605,2480 2620,2465 2640,2465
VCC5 on Top "VCC5_L01_P018" (solid, pour order 18): 3065,3187.5 3067.5,3190 3110,3190 3110,3165 3095,3150 3065,3150
VCC3.3 on Top "VCC3.3_L01_P017" (solid, pour order 17): 3545,2805 3550,2800 3550,2630 3620,2630 3630,2640 3630,2805
GND on Top "GND_L01_P016" (solid, pour order 16): 3290,2665 3310,2645 3370,2645 3405,2610 3445,2610 3445,2625 3405,2625 3405,2675 3430,2700 3450,2700 3450,2750 3455,2755 3375,2755 3375,2750
NetC1_2 on Top "NETC1_2_L01_P015" (solid, pour order 15): 3260,2540 3450,2540 3460,2550 3455,2555 3455,2595 3255,2595 3250,2590
VCC5 on Top "VCC5_L01_P014" (solid, pour order 14): 3500,3160 3835,3160 3835,2905 3500,2905
V6 on Top "V6_L01_P013" (solid, pour order 13): 2480,4345 2515,4380 2515,4440 2730,4440 2765,4405 2765,4345 2815,4345 2815,4435 2775,4435 2730,4480 2725,4475 2505,4475 2495,4465 2495,4400 2455,4360 2450,4365 2420,4365 2420,4345 2440,4345
GGND on Top "GGND_L01_P012" (solid, pour order 12): 2425,4265 2635,4265 2697.17,4327.17 2697.17,4335 2565,4335 2540,4310 2465,4310 2440,4285 2425,4285
NetC12_1 on Top "NETC12_1_L01_P011" (solid, pour order 11): 2570,3990 2570,4135 2490,4135 2490,4195 2465,4220 2405,4220 2405,4145 2460,4090 2505,4090 2544.96,4050.04 2544.96,3990
GND on Top "GND_L01_P010" (solid, pour order 10): 3265,2655 3305,2655 3305,2770 3265,2770
VCC-5 on Top "VCC-5_L01_P009" (solid, pour order 9): 3315,3270 3420,3375 3730,3375 3730,3560 3725,3555 3510,3555 3410,3455 3210,3455 3210,3285 3220,3275
VCC5 on Top "VCC5_L01_P007" (solid, pour order 7): 3100,2655 3100,2780 3055,2825 3055,3015 3075,3035 3075,3190 3055,3185 3050,3050 3003.74,3050 2990,3036.26 3010,3016.26 3010,2715 2790,2715 2765,2690 2765,2650 2985,2650 3080,2555 2760,2555 2715,2510 2730,2495 2730,2460 2805,2460 2880,2535 3090.04,2535 3120.04,2565
GGND on Top "GGND_L01_P006" (solid, pour order 6): 2125,2850 2130,2845 2255,2845 2255,2585 2275,2565 2580,2565 2580,2685 2590,2675 2635,2675 2610,2650 2610,2550 2530,2470 2520,2470 2450,2540 2210,2540 2195,2555
V5 on Top "V5_L01_P004" (solid, pour order 4): 2345,2745 2345,2985 2415,3055 2415,3250 2525,3250 2525,3175 2425,3075 2425,2825 2610,2825 2610,2749.42
NetC8_1 on Top "NETC8_1_L01_P003" (solid, pour order 3): 2555,3645 2845,3645 2850,3640 2845,3635 2845,3580 2765,3580 2545,3360 2470,3360 2470,3420
VBAT+ on Top "VBAT+_L01_P001" (solid, pour order 1): 2035,3780 2200,3780 2200,3385 2020,3385
GGND on GND02 (split plane): 3379.9,3707.89 3379.9,2395.1 1790.1,2395.1 1790.1,3994.9 3092.89,3994.9
GND on GND02 (split plane): 6079.9,2395.1 3390.1,2395.1 3390.1,3710 3389.71,3711.95 3388.6,3713.6 3098.6,4003.6 3096.95,4004.71 3095,4005.1 1790.1,4005.1 1790.1,4909.9 6079.9,4909.9
GGND on GND02 (split plane): 6049.9,2420.1 5780.1,2420.1 5780.1,2674.9 6049.9,2674.9
GGND on GND02 (split plane): 2069.9,4605.1 1805.1,4605.1 1805.1,4869.9 2069.9,4869.9
GGND on GND02 (split plane): 6044.9,4610.1 5790.1,4610.1 5790.1,4872.89 5792.11,4874.9 6044.9,4874.9
VCC3.3 on PWR03 (split plane): 6079.9,2395.1 1790.1,2395.1 1790.1,4909.9 6079.9,4909.9

## Keep-outs
Keep-Out Layer:
  lines w10: 1770,4630 1770,4925 ; 5880,4925 1770,4925 ; 5885,4925 6099.92,4925 ; 6100,2370 1770,2370 1770,4925 ; 6100,2375 6100,4924.92

## Other copper
Top:
  pour cut-out: 2440,4380 2465,4380 2465,4350 2460,4355 2440,4355
  pour cut-out: 2515,4320 2517.5,4322.5 2552.5,4322.5 2552.5,4307.5 2550,4305 2515,4305
GND02 (plane layer: these items are gaps in the copper):
  lines w10: 1770,4000 3095,4000 3385,3710 3385,2375 ; 5775,2675 5775,2415 6055,2415 6055,2680 5775,2680 ; 1800,4600 1800,4875 2075,4875 2075,4600 1800,4600 ; 5785,4605 5785,4875 5790,4880 6050,4880 6050,4605 5785,4605

## Silkscreen, mask and mechanical layers (free items; w line width, h text height)
Mechanical 1:
  lines w10: 1770,4635 1770,4930 ; 5880,4930 1770,4930 ; 5885,4930 6099.92,4930 ; 6100,2375 1770,2375 1770,4930 ; 6100,2380 6100,4929.92

## Text inside footprints (layer, text, board x,y; h text height)
J5: Top Overlay "1" at 4940,2465 h50; Top Overlay "2" at 4920,2565 h50; Top Overlay "5" at 5280,2465 h50; Top Overlay "6" at 5280,2565 h50
J6: Top Overlay "2" at 3640,3575 h50 r90; Top Overlay "1" at 3740,3575 h50 r90; Top Overlay "1" at 3740,4255 h50 r90; Top Overlay "1" at 3740,4295 h50 r90; Top Overlay "12" at 3640,4255 h50 r90
J7: Top Overlay "2" at 3635,2920 h50 r90; Top Overlay "1" at 3735,2920 h50 r90; Top Overlay "1" at 3735,3600 h50 r90; Top Overlay "1" at 3735,3640 h50 r90; Top Overlay "12" at 3635,3600 h50 r90
J8: Top Overlay "1" at 4020,4849.78 h50 r180; Top Overlay "2" at 4040,4749.78 h50 r180; Top Overlay "5" at 3680,4849.78 h50 r180; Top Overlay "6" at 3680,4749.78 h50 r180
J10: Top Overlay "2" at 4095,3095 h50; Top Overlay "1" at 4095,2995 h50
J11: Top Overlay "22" at 4063.19,3155 h50 r270; Top Overlay "21" at 3963.19,3155 h50 r270; Top Overlay "2" at 4063.19,4315 h50 r270; Top Overlay "1" at 3963.19,4315 h50 r270
J12: Top Overlay "22" at 5286.81,3155 h50 r270; Top Overlay "21" at 5186.81,3155 h50 r270; Top Overlay "2" at 5286.81,4315 h50 r270; Top Overlay "1" at 5186.81,4315 h50 r270
J14: Top Overlay "8" at 4885,2565 h50; Top Overlay "7" at 4885,2465 h50; Top Overlay "1" at 4445,2465 h50; Top Overlay "2" at 4425,2565 h50
LS1: Top Overlay "+" at 5980,3000 h30 r90